# Altium PCB QFN24.PcbDoc
Units mil, origin at the board's own origin, x right, y up, seen from the top; angles counter-clockwise.
Board outline 550.03 x 1250.03 mil, 2 copper layers (Top Layer, Bottom Layer); 3 components, 25 nets, 49 pads, 4 vias.
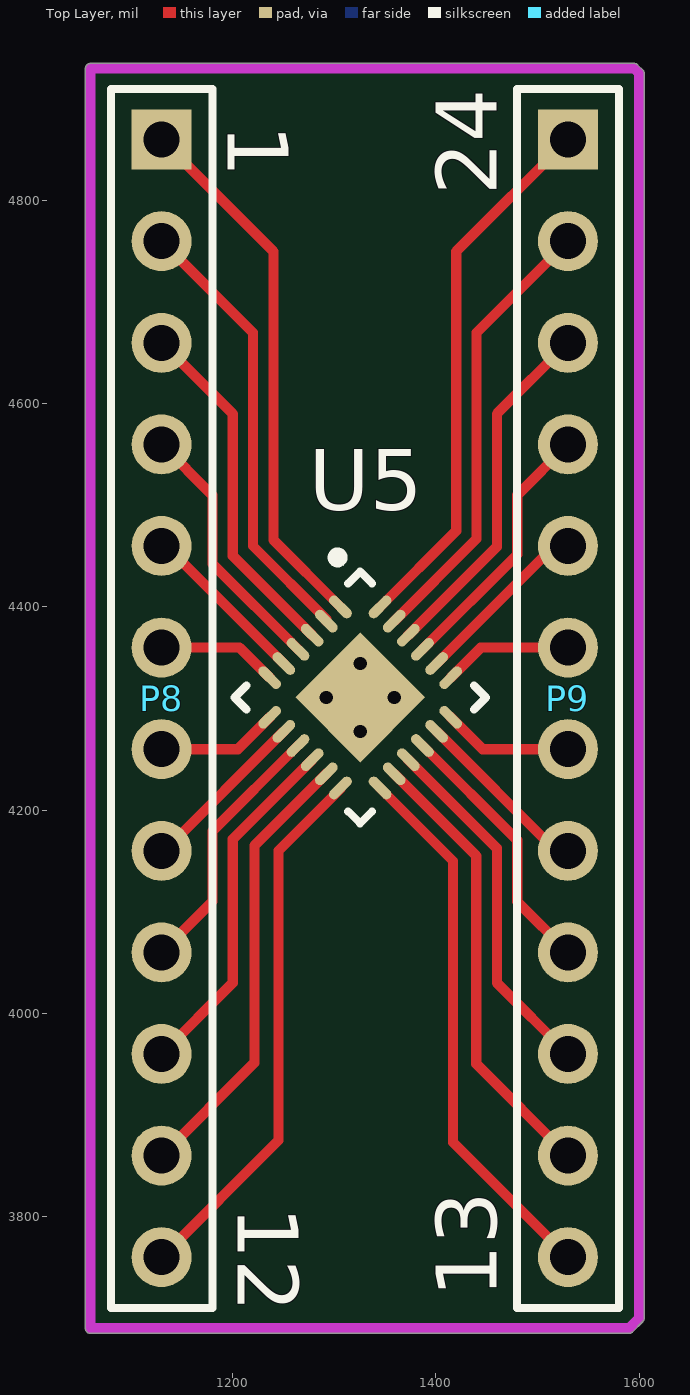
[diagram p0: Top Layer view]
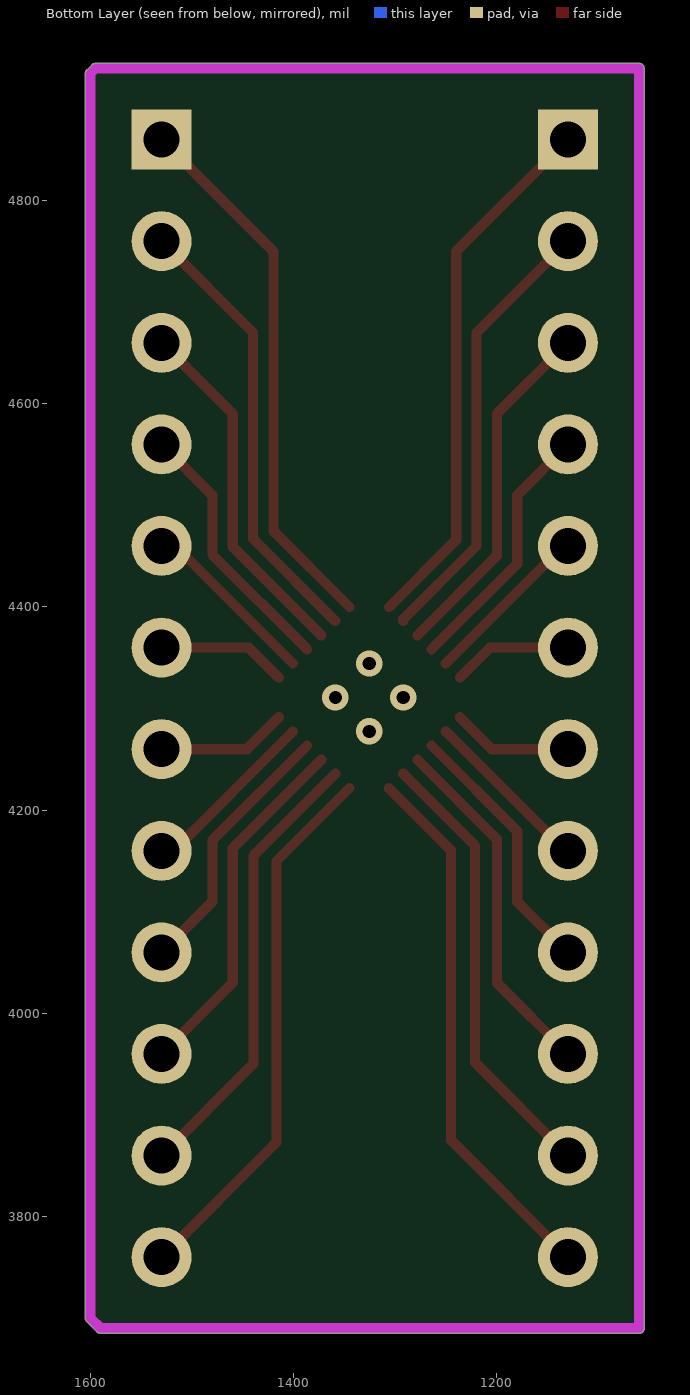
[diagram p1: Bottom Layer view, seen from below]

## Layer stack, top to bottom
Top Solder: solder mask 0.4, Solder Resist, Dk 3.5
Top Layer: signal copper 1.4
Dielectric 1: dielectric 12.6, FR-4, Dk 4.8
Bottom Layer: signal copper 1.4
Bottom Solder: solder mask 0.4, Solder Resist, Dk 3.5

## Board outline
1060,3684.99 cw(c1060,3690) 1054.98,3690 1054.98,4930 cw(c1060,4930) 1060,4935.02 1595,4935.02 cw(c1595,4930) 1598.56,4933.53 1598.55,4933.55 1603.55,4928.55 1603.53,4928.56 cw(c1600,4925) 1605.02,4925 1605.02,3700 cw(c1600,3700) 1603.53,3696.44 1603.55,3696.45 1593.55,3686.45 1593.56,3686.47 cw(c1590,3690) 1590,3684.99

## Design rules (kind name [scope] priority, off if disabled: settings)
Clearance [All] p1 off: gap=10 ignorepadtopadclearanceinfootprint=FALSE except(0: Arc-Hole Track-Hole SMDPad-Hole THPad-Hole Via-Hole Fill-Hole Poly-Hole Region-Hole Text-Hole)
ComponentClearance [All] p1 off: gap=10 collisioncheckmode=3 verticalgap=10 showdistances=FALSE
PolygonConnect [All] p1: connectstyle=Relief reliefconductorwidth=10 reliefentries=4 polygonreliefangle="90 Angle" airgapwidth=10
RoutingVias [All] p1: holewidth=28 width=50 viastyle="Through Hole" minholewidth=28 minwidth=50 maxholewidth=28 maxwidth=50
SolderMaskExpansion [All] p1: expansion=4
Width [All] p1: maxlimit=10 minlimit=10 preferedwidth=10
29 further rules are at their usual default settings.

## Components (designator, comment, footprint, x,y, rotation, side; value= is the part's Value field where it differs from the comment)
P8 "" HDR1X12 1130,4860 r270 top
P9 "" HDR1X12 1530,4860 r270 top
U5 "" QFN24_4X4_L 1325.51,4310.92 r315 top

## Footprints (in the part's own frame and the unit in brackets; to place one, negate y for a bottom-side part, rotate by r counter-clockwise, add the part's x,y. Pads: shape width x height; smd on the part's side, far side on the other; paste and mask are expansions set on the pad)
HDR1X12 [mm] "Connector; Header; 12 Position"
  rect 1.5x1.5 hole 0.9: 1(0,0)
  round 1.5 hole 0.9: 2(2.54,0) 3(5.08,0) 4(7.62,0) 5(10.16,0) 6(12.7,0) 7(15.24,0) 8(17.78,0) 9(20.32,0) 10(22.86,0) 11(25.4,0) 12(27.94,0)
  silkscreen extent -1.27,-1.27 29.21,1.27
QFN24_4X4_L [mm] "QFN, 24-Leads, Body 4x4mm, Pitch 0.5mm, IPC High Density"
  oval 0.7x0.25 smd: 1(-1.95,1.25) 2(-1.95,0.75) 3(-1.95,0.25) 4(-1.95,-0.25) 5(-1.95,-0.75) 6(-1.95,-1.25) 13(1.95,-1.25) 14(1.95,-0.75) 15(1.95,-0.25) 16(1.95,0.25) 17(1.95,0.75) 18(1.95,1.25)
  oval 0.25x0.7 smd: 7(-1.25,-1.95) 8(-0.75,-1.95) 9(-0.25,-1.95) 10(0.25,-1.95) 11(0.75,-1.95) 12(1.25,-1.95) 19(1.25,1.95) 20(0.75,1.95) 21(0.25,1.95) 22(-0.25,1.95) 23(-0.75,1.95) 24(-1.25,1.95)
  rect 2.3x2.3 smd: 25(0,0)
  silkscreen extent -3,-2.23 2.23,2.23, body extent -2.07,-2.07 2.07,2.07, height 1

## Via types
v1: diameter 25.98, hole 12.99, Top Layer to Bottom Layer, tented top, 4 vias

## Nets (pads, with @x,y where several pads share a name; then routed paths per layer and width w, separated by ;. In a path a pad name is that pad's centre, name@x,y a point inside that pad or via, vN(x,y) a via of type N, cw(c..) or ccw(c..) an arc to the next point about the centre after c; other vN are vias at no path point)
U5-1: P8.1 U5.1 | length 532.9
  Top Layer w10: P8.1 1240,4750 1240,4466.03 U5.1
U5-2: P8.2 U5.2 | length 441.1
  Top Layer w10: P8.2 1220,4670 1220,4460 1292.11,4387.89 U5.2
U5-3: P8.3 U5.3 | length 349.2
  Top Layer w10: P8.3 1200,4590 1200,4450.35 U5.3
U5-4: P8.4 U5.4 | length 257.4
  Top Layer w10: P8.4 1180,4510 1180,4442.51 U5.4
U5-5: P8.5 U5.5 | length 168.3
  Top Layer w10: P8.5 1134.67,4460 U5.5
U5-6: P8.6 U5.6 | length 118.7
  Top Layer w10: P8.6 1206.83,4360 U5.6
U5-7: P8.7 U5.7 | length 119.4
  Top Layer w10: P8.7 1205,4260 U5.7
U5-8: P8.8 U5.8 | length 169
  Top Layer w10: P8.8 1132.84,4160 U5.8
U5-9: P8.9 U5.9 | length 259.2
  Top Layer w10: P8.9 1180,4110 1180,4179.32 U5.9
U5-10: P8.10 U5.10 | length 351.1
  Top Layer w10: P8.10 1200,4030 1200,4171.48 U5.10
U5-11: P8.11 U5.11 | length 442.9
  Top Layer w10: P8.11 1221.36,3951.36 1221.36,4165 U5.11
U5-12: P8.12 U5.12 | length 534.7
  Top Layer w10: P8.12 1245,3875 1245,4160 1306.03,4221.03 U5.12
U5-13: P9.12 U5.13 | length 538.5
  Top Layer w10: U5.13 1416.83,4150 1416.83,3873.17 P9.12
U5-14: P9.11 U5.14 | length 446.6
  Top Layer w10: U5.14 1439.67,4155 1439.67,3950.33 P9.11
U5-15: P9.10 U5.15 | length 354.8
  Top Layer w10: U5.15 1460,4162.51 1460,4030 P9.10
U5-16: P9.9 U5.16 | length 262.9
  Top Layer w10: U5.16 1480,4170.35 1480,4110 P9.9
U5-17: P9.8 U5.17 | length 178
  Top Layer w10: U5.17 1518.19,4160 P9.8
U5-18: P9.7 U5.18 | length 128.4
  Top Layer w10: U5.18 1446.03,4260 P9.7
U5-19: P9.6 U5.19 | length 127.7
  Top Layer w10: U5.19 1444.2,4360 P9.6
U5-20: P9.5 U5.20 | length 177.2
  Top Layer w10: U5.20 1516.36,4460 P9.5
U5-21: P9.4 U5.21 | length 261.1
  Top Layer w10: U5.21 1480,4451.48 1480,4510 P9.4
U5-22: P9.3 U5.22 | length 352.9
  Top Layer w10: U5.22 1460,4459.32 1460,4590 P9.3
U5-23: P9.2 U5.23 | length 444.8
  Top Layer w10: U5.23 1440,4467.16 1440,4670 P9.2
U5-24: P9.1 U5.24 | length 536.6
  Top Layer w10: U5.24 1420,4475 1420,4750 P9.1
U5-PAD: U5.25
copper on no net:
  other v1: 1325.51,4277.51 1292.11,4310.92 1358.92,4310.92 1325.51,4344.32

## Keep-outs
Keep-Out Layer:
  lines w10: 1060,3690 1060,4930 1595,4930 1600,4925 1600,3700 1590,3690 1060,3690

## Silkscreen, mask and mechanical layers (free items; w line width, h text height)
Top Overlay:
  text "1" at 1195,4875 h60 r270
  text "24" at 1460,4805 h60 r90
  text "12" at 1205,3810 h60 r270
  text "13" at 1460,3720 h60 r90